# Altium PCB PCB_YMF288-M MegaMod_2021-11-02.pcbdoc
Units mil, origin at the board's own origin, x right, y up, seen from the top; angles counter-clockwise.
Board outline 4825 x 3175 mil, 2 copper layers (Top Layer, Bottom Layer); 31 components, 42 nets, 165 pads, 23 vias.
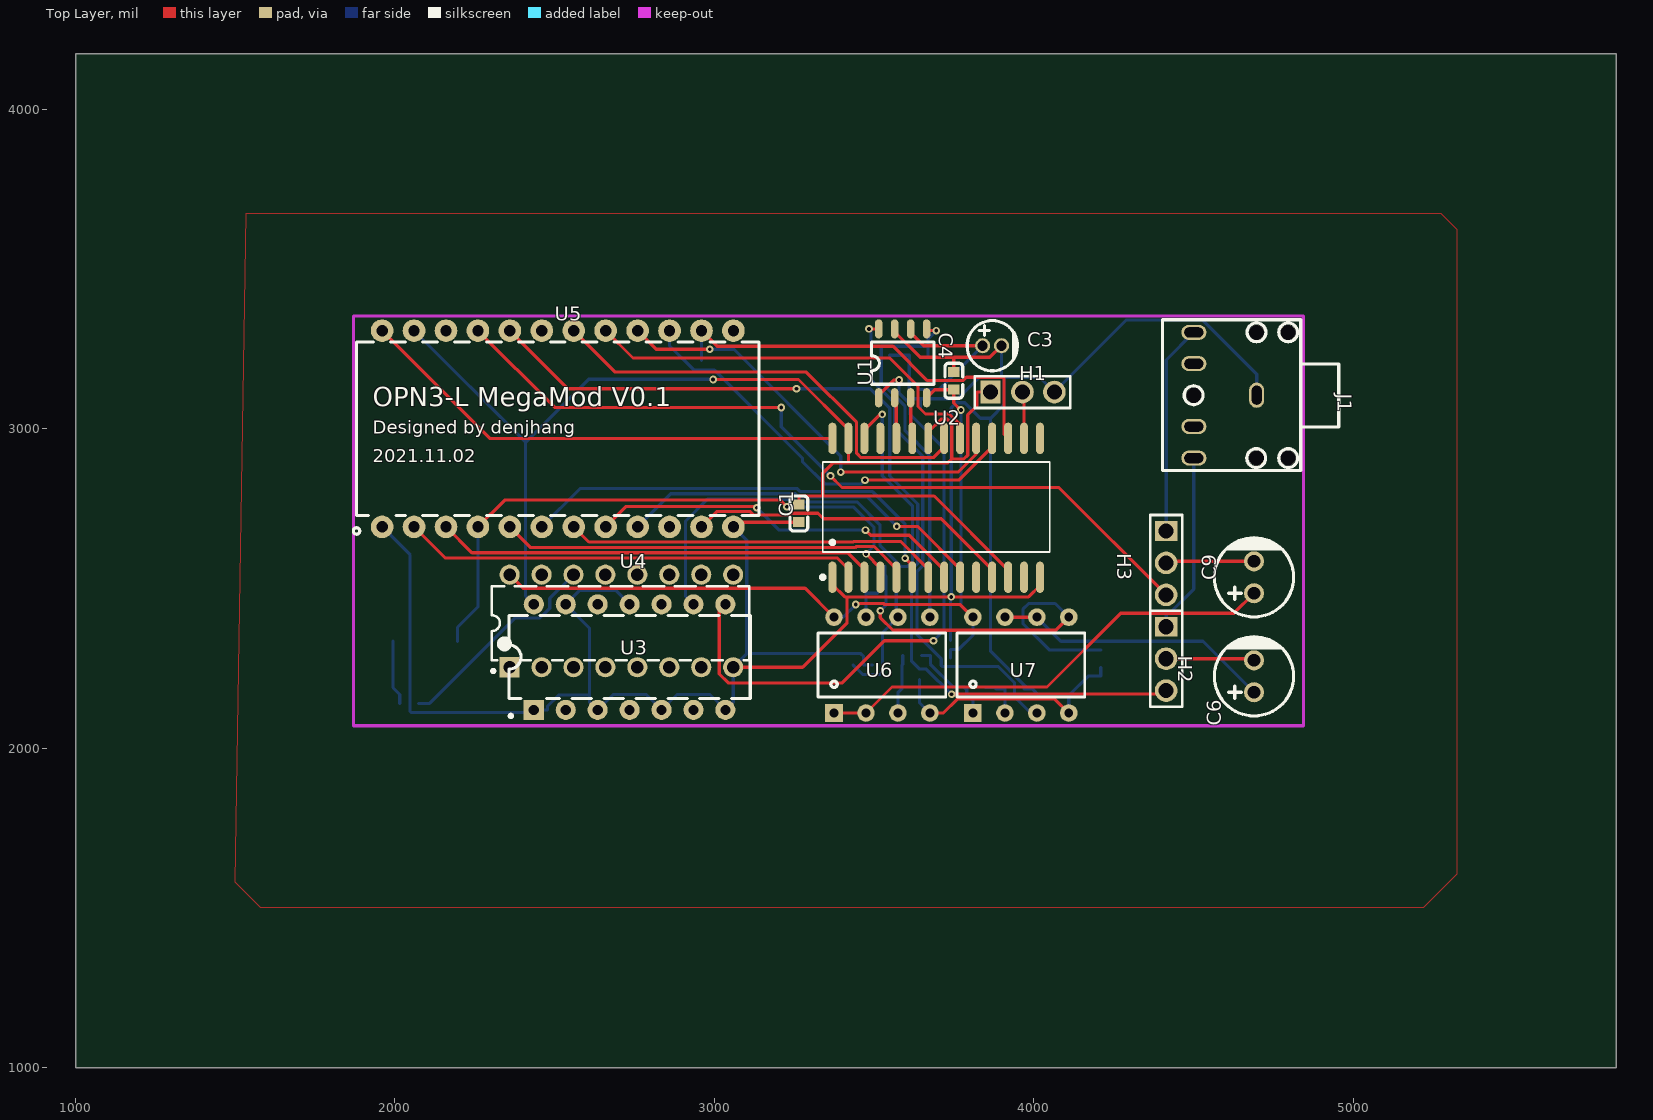
[diagram p0: Top Layer view]
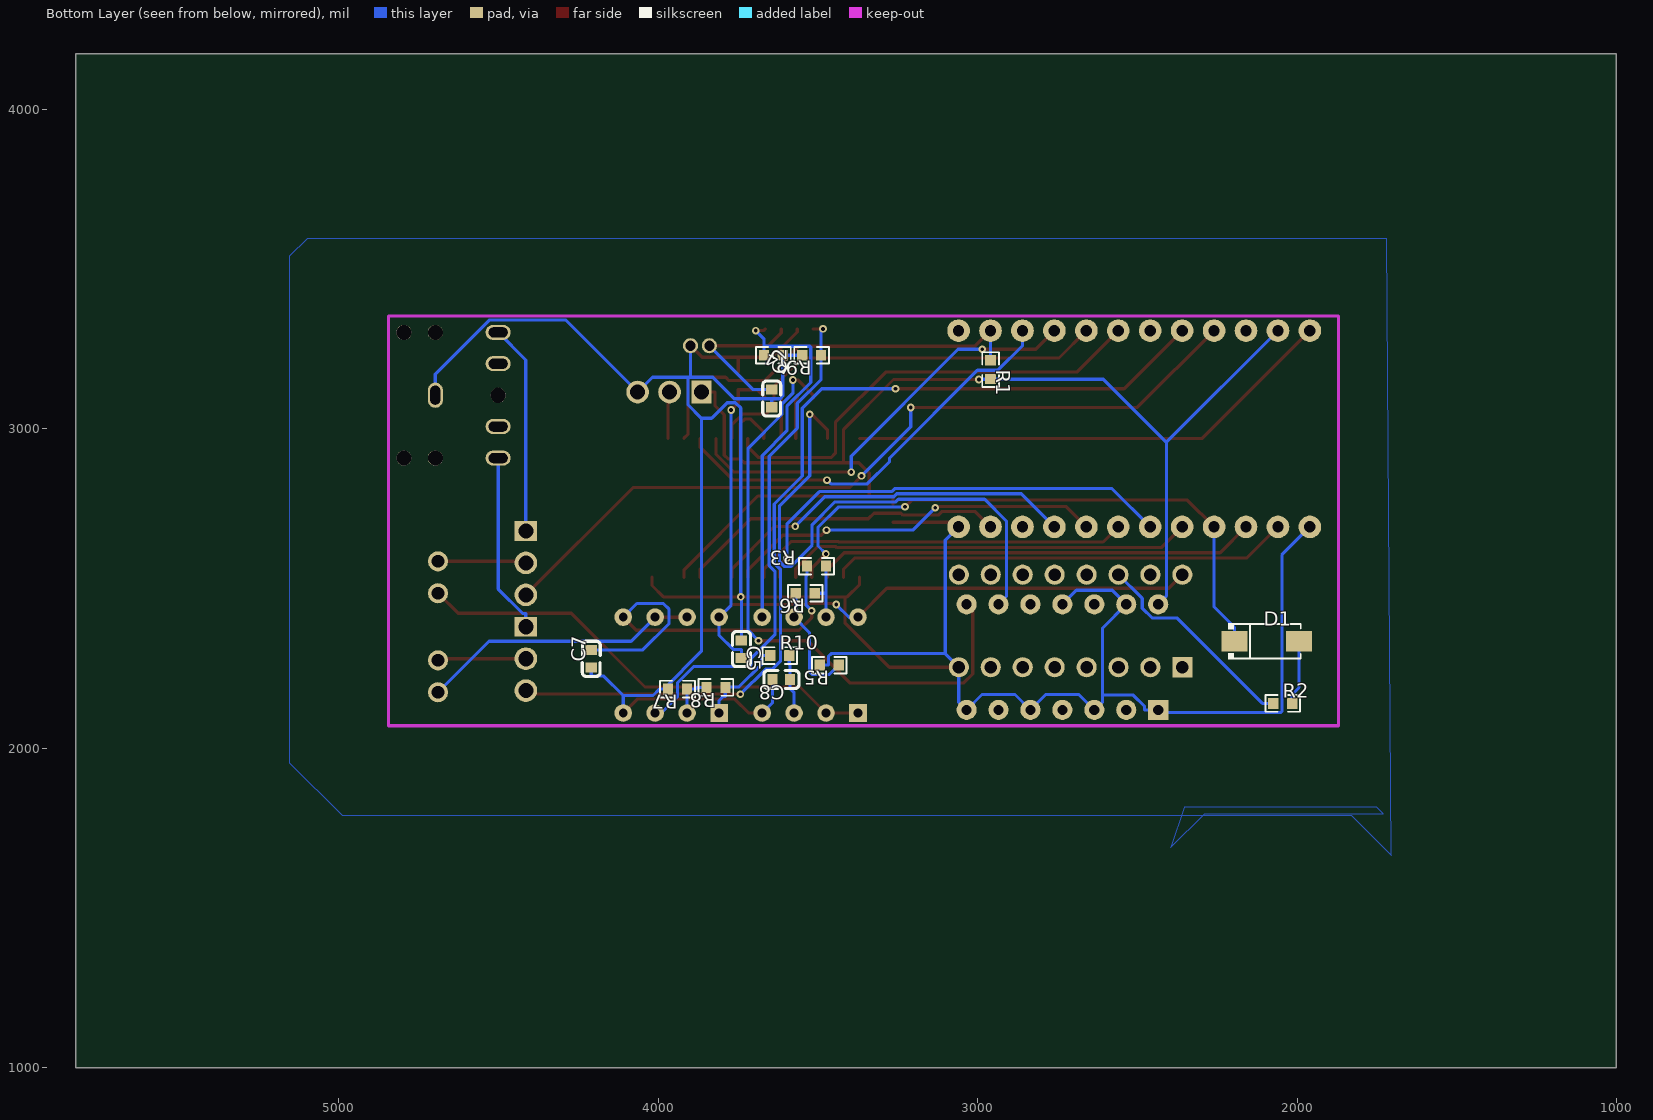
[diagram p1: Bottom Layer view, seen from below]

## Layer stack, top to bottom
Top Layer: signal copper (thickness not stored)
Dielectric: dielectric 12.6, FR-4, Dk 4.8
Bottom Layer: signal copper (thickness not stored)

## Board outline
5825,1000 1000,1000 1000,4175 5825,4175

## Components (designator, comment, footprint, x,y, rotation, side; value= is the part's Value field where it differs from the comment)
C1 "0.1u" C0603#1 3265,2735 r90 top
C2 "0.1u" C0603#2 3645,3095 r270 bottom
C3 "47uF" CAP-TH_BD4.0-P1.50-D0.8-FD 3870,3260 r0 top
C4 "0.1u" C0603#1 3750,3150 r270 top
C5 "0.1u" C0603#2 3740,2310 r90 bottom
C6 "4.7uF" CAP-TH_BD6.3-P2.50-D1.0-FD 4690,2225 r90 top
C7 "10n" C0603#2 4210,2280 r270 bottom
C8 "10n" C0603#2 3615,2215 r180 bottom
C9 "4.7uF" CAP-TH_BD6.3-P2.50-D1.0-FD 4690,2535 r90 top
D1 "SS14" SMA_L4.4-W2.8-LS5.4-RD 2095,2335 r0 bottom
H1 "Header-Male-2.54_1x3" HDR-TH_3P-P2.54-V-M-1 3965,3115 r0 top
H2 "Header-Male-2.54_1x3" HDR-TH_3P-P2.54-V-M-1 4415,2280 r270 top
H3 "Header-Male-2.54_1x3" HDR-TH_3P-P2.54-V-M-1 4415,2580 r270 top
J1 "PJ-307C" AUDIO-TH_PJ307C 4600,3105 r270 top
R1 "62k" R0603 2960,3185 r90 bottom
R2 "1k" R0603 2045,2140 r0 bottom
R3 "3.6k" R0603 3505,2570 r180 bottom
R4 "10k" R0603 3640,3230 r180 bottom
R5 "15k" R0603 3465,2260 r180 bottom
R6 "3.9k" R0603 3540,2485 r180 bottom
R7 "10k" R0603 3940,2185 r180 bottom
R8 "3.6k" R0603 3820,2190 r180 bottom
R9 "10k" R0603 3520,3230 r180 bottom
R10 "3.6k" R0603 3620,2290 r0 bottom
U1 "uPD6379GR" SOIC-8_L5.0-W4.0-P1.27-LS6.0-BL 3590,3205 r0 top
U2 "YMF288-M" SOP-28-YMF288 3695,2755 r0 top
U3 "74HC04N" DIP-14_L19.2-W6.6-P2.54-LS10.9-BL 2735,2285 r0 top
U4 "MegaGRRL IC-DCSG" DIP-16_L20.4-W5.8-P2.54-LS7.6-BL 2709.2,2398.19 r0 top
U5 "MegaGRRL IC-FM" DIP-24_L32.0-W13.8-P2.54-LS15.6-BL 2510,3000 r0 top
U6 "SA5532AP" DIP8 3525,2260 r0 top
U7 "SA5532AP" DIP8 3960,2260 r0 top

## Footprints (in the part's own frame and the unit in brackets; to place one, negate y for a bottom-side part, rotate by r counter-clockwise, add the part's x,y. Pads: shape width x height; smd on the part's side, far side on the other; paste and mask are expansions set on the pad)
AUDIO-TH_PJ307C [mm]
  oval 2x1.2 hole 0.8 slot 1.5 at 0 deg: 1(0,2.5)
  oval 1.2x2 hole 0.8 slot 1.5 at 90 deg: 2(5,-2.5) 3(2.489,-2.5) 4(-2.511,-2.5) 5(-5,-2.5)
  round 1.2 hole 1.2 unplated: ""(-5,2.5) ""(-5,5) ""(0,-2.5) ""(5,2.5) ""(5,5)
  silkscreen extent -6.01,-4.99 5.99,9.03
C0603#1 [mm]
  rect 0.8x0.9 smd: 1(-0.7,0) 2(0.7,0)
  silkscreen extent -1.41,-0.71 1.39,0.72
C0603#2 [mm]
  rect 0.8x0.9 smd: 1(0.7,0) 2(-0.7,0)
  silkscreen extent -1.39,-0.72 1.41,0.71
CAP-TH_BD4.0-P1.50-D0.8-FD [mm]
  round 1.2 hole 0.8: 1(-0.75,0) 2(0.75,0)
  silkscreen extent -1.98,-2 2.06,2
CAP-TH_BD6.3-P2.50-D1.0-FD [mm]
  round 1.6 hole 1: 1(-1.27,0) 2(1.27,0)
  silkscreen extent -3.15,-3.15 3.17,3.15
DIP8 [mil]
  rect 55x55 hole 28: 1(-150,-150)
  round 55 hole 28: 2(-50,-150) 3(50,-150) 4(150,-150) 5(150,150) 6(50,150) 7(-50,150) 8(-150,150)
  silkscreen extent -200,-100 200,100
DIP-14_L19.2-W6.6-P2.54-LS10.9-BL [mil]
  rect 63x63 hole 32: 1(-300,-165.35)
  round 63 hole 32: 2(-200,-165.35) 3(-100,-165.35) 4(0,-165.35) 5(100,-165.35) 6(200,-165.35) 7(300,-165.35) 8(300,165.35) 9(200,165.35) 10(100,165.35) 11(0,165.35) 12(-100,165.35) 13(-200,165.35) 14(-300,165.35)
  silkscreen extent -378,-189 378,130
DIP-16_L20.4-W5.8-P2.54-LS7.6-BL [mm]
  rect 1.6x1.6 hole 1: 1(-8.89,-3.68)
  round 1.6 hole 1: 2(-6.35,-3.68) 3(-3.81,-3.68) 4(-1.27,-3.68) 5(1.27,-3.68) 6(3.81,-3.68) 7(6.35,-3.68) 8(8.89,-3.68) 9(8.89,3.68) 10(6.35,3.68) 11(3.81,3.68) 12(1.27,3.68) 13(-1.27,3.68) 14(-3.81,3.68) 15(-6.35,3.68) 16(-8.89,3.68)
  silkscreen extent -10.31,-4.1 10.16,2.77
DIP-24_L32.0-W13.8-P2.54-LS15.6-BL [mm]
  round 1.8 hole 0.9: 1(-13.97,-7.8) 2(-11.43,-7.8) 3(-8.89,-7.8) 4(-6.35,-7.8) 5(-3.81,-7.8) 6(-1.27,-7.8) 7(1.27,-7.8) 8(3.81,-7.8) 9(6.35,-7.8) 10(8.89,-7.8) 11(11.43,-7.8) 12(13.97,-7.8) 13(13.97,7.8) 14(11.43,7.8) 15(8.89,7.8) 16(6.35,7.8) 17(3.81,7.8) 18(1.27,7.8) 19(-1.27,7.8) 20(-3.81,7.8) 21(-6.35,7.8) 22(-8.89,7.8) 23(-11.43,7.8) 24(-13.97,7.8)
  silkscreen extent -16.26,-8.38 16,6.9
HDR-TH_3P-P2.54-V-M-1 [mm]
  rect 1.575x1.8 hole 1.2: 1(-2.54,0)
  round 1.8 hole 1.2: 2(0,0) 3(2.54,0)
  silkscreen extent -3.81,-1.27 3.81,1.27
R0603 [mil]
  rect 31.75x34.02 smd: 1(29.66,0) 2(-29.66,0)
  silkscreen extent -55,-26 55,26
SMA_L4.4-W2.8-LS5.4-RD [mm]
  rect 2.046x1.62 smd: 1(2.566,0) 2(-2.565,0)
  silkscreen extent -2.7,-1.44 3.08,1.44
SOIC-8_L5.0-W4.0-P1.27-LS6.0-BL [mm]
  oval 0.6x1.52 smd: 1(-1.905,-2.74) 2(-0.635,-2.74) 3(0.635,-2.74) 4(1.905,-2.74) 5(1.905,2.74) 6(0.635,2.74) 7(-0.635,2.74) 8(-1.905,2.74)
  silkscreen extent -2.49,-1.67 2.5,1.7
SOP-28-YMF288 [mm]
  oval 0.63x2.5 smd: 1(-8.255,-5.588) 2(-6.985,-5.588) 3(-5.715,-5.588) 4(-4.445,-5.588) 5(-3.175,-5.588) 6(-1.905,-5.588) 7(-0.635,-5.588) 8(0.635,-5.588) 9(1.905,-5.588) 10(3.175,-5.588) 11(4.445,-5.588) 12(5.715,-5.588) 13(6.985,-5.588) 14(8.255,-5.588) 15(8.255,5.461) 16(6.985,5.461) 17(5.715,5.461) 18(4.445,5.461) 19(3.175,5.461) 20(1.905,5.461) 21(0.635,5.461) 22(-0.635,5.461) 23(-1.905,5.461) 24(-3.175,5.461) 25(-4.445,5.461) 26(-5.715,5.461) 27(-6.985,5.461) 28(-8.255,5.461)
  silkscreen extent -9.17,-5.74 9.03,3.57

## Via types
v1: diameter 24.02, hole 12.01, Top Layer to Bottom Layer, 23 vias

## Nets (pads, with @x,y where several pads share a name; then routed paths per layer and width w, separated by ;. In a path a pad name is that pad's centre, name@x,y a point inside that pad or via, vN(x,y) a via of type N, cw(c..) or ccw(c..) an arc to the next point about the centre after c; other vN are vias at no path point)
/COM: H1.2 U2.16 | length 147.1
  Top Layer w10: H1.2 3970,3110 U2.16
/CS: R1.1 U2.17 U5.14 | length 1303.9
  Top Layer w10: U5.14 2960.32,3307.09 3009.27,3258.14 3559.9,3258.14 3667.31,3150.73 3778.8,3150.73 3789.57,3161.5 3904.16,3161.5 3907.09,3158.57 3907.09,2982.91 U2.17
  Bottom Layer w10: R1.1 U5.14
/IC: U2.11 U5.11 | length 1034.1
  Top Layer w10: U5.11 3007.77,2740.68 3112.42,2740.68 3123.52,2729.58 3234.19,2729.58 3240.35,2735.74 3324.76,2735.74 3342.42,2718.08 3710.79,2718.08 3870,2558.87 U2.11
/LRO: U1.1 U3.8 | length 1942.6
  Top Layer w10: U3.8 3015.66,2431.01 3015.66,2232.23 3043.58,2204.31 3400.75,2204.31 3532.74,2336.3 v1(3686.56,2336.3) ; U1.1 3515,3105.3 3562.18,3152.48 v1(3578.72,3152.48)
  Bottom Layer w10: v1(3578.72,3152.48) 3578.72,3111.49 3613.6,3076.61 3613.6,3044.7 3719.19,2939.11 3719.19,2368.93 v1(3686.56,2336.3)
/RD: U2.19 U5.16 | length 1345.5
  Top Layer w10: U5.16 2818.2,3248.89 v1(2985.87,3248.89) ; v1(3396.17,2864.17) 3763.24,2864.17 3820,2920.93 U2.19
  Bottom Layer w10: v1(2985.87,3248.89) 3061.75,3248.89 3396.17,2914.47 v1(3396.17,2864.17)
/WR: U2.18 U5.15 | length 1317.3
  Top Layer w10: v1(3471.95,2839.3) 3765.38,2839.3 3870,2943.92 U2.18
  Bottom Layer w10: U5.15 2860,3259.88 2936.73,3183.15 3001.14,3183.15 3276.44,2907.85 3276.44,2896.76 3345.94,2827.26 3459.91,2827.26 v1(3471.95,2839.3)
A0: U2.20 U5.17 | length 1312
  Top Layer w10: U5.17 2745.51,3221.58 3549.81,3221.58 3637.89,3133.5 3637.89,3069.77 3661.29,3046.37 3736.39,3046.37 3770,3012.76 U2.20
A1: U2.21 U5.18 | length 1421.3
  Top Layer w10: U5.18 2689.62,3177.47 3288.17,3177.47 3445.83,3019.81 3445.83,2923.36 3459.61,2909.58 3685.44,2909.58 3720,2944.14 U2.21
A.VCC: C4.2 C5.2 U1.4 U4.16 U6.8 U7.8 | length 2546
  Top Layer w10: U4.16 2401.77,2500.5 3284.5,2500.5 U6.8 ; v1(3442.87,2449.62) 3446.31,2453.06 3529.58,2453.06 3533.02,2449.62 3770.38,2449.62 U7.8 ; U1.4 3690.31,3122.44 C4.2 3750,3080.78 v1(3772.22,3058.56)
  Bottom Layer w10: U6.8 3403.25,2410 v1(3442.87,2449.62) ; C5.2 3740,2309.26 3765.71,2309.26 3810,2353.55 U7.8 3772.22,2447.78 v1(3772.22,3058.56)
BCO: U1.3 U2.23 | length 129.2
  Top Layer w10: U1.3 3615,2975 U2.23
C6_1: C6.1 U7.6 U7.7 | length 877.3
  Top Layer w10: U7.7 U7.6
  Bottom Layer w10: U7.6 4085.35,2334.65 4530.35,2334.65 C6.1
C7_2: C7.2 R3.2 U7.5 | length 1284.1
  Top Layer w10: v1(3520.01,2429.98) 3520.01,2408.77 3559.76,2369.02 4069.02,2369.02 U7.5
  Bottom Layer w10: v1(3520.01,2429.98) 3537.3,2447.27 3537.3,2539.28 3534.66,2541.92 R3.2 ; U7.5 4067.05,2452.95 3984.78,2452.95 3966.33,2434.5 3966.33,2390.37 4049.14,2307.56 C7.2
C8_1: C8.1 R10.2 U6.3 | length 186.4
  Bottom Layer w10: U6.3 3575,2173.77 3587.44,2186.21 3587.44,2200.61 C8.1 3587.44,2259.02 3590.34,2261.92 R10.2
C9_1: C9.1 U6.1 U6.2 | length 1470.3
  Top Layer w10: U6.1 U6.2 3556.59,2191.59 4041.94,2191.59 4272.44,2422.09 4627.09,2422.09 C9.1
D0: U2.2 U5.2 | length 1440.6
  Top Layer w10: U5.2 2157.48,2595.43 3385.44,2595.43 3420,2560.87 U2.2
D1: U2.3 U5.3 | length 1389.8
  Top Layer w10: U5.3 2241.24,2611.67 3417.92,2611.67 3470,2559.59 U2.3
D1_2: D1.2 R2.2 | length 203.8
  Bottom Layer w10: D1.2 1994,2189.42 2015.34,2168.08 R2.2
D2: D1.1 U2.4 U5.4 | length 1880
  Top Layer w10: U5.4 2343.62,2776.53 3206.89,2776.53 v1(3227.69,2755.73) ; v1(3475.46,2608.22) 3520,2563.68 U2.4
  Bottom Layer w10: D1.1 2196,2377.96 2260,2441.96 U5.4 ; v1(3227.69,2755.73) 3228.56,2754.86 3437.39,2754.86 3500.26,2691.99 3500.26,2633.02 v1(3475.46,2608.22)
D3: U2.5 U5.5 | length 1294
  Top Layer w10: U5.5 2425.14,2627.77 3440.91,2627.77 3444.44,2631.3 3500.39,2631.3 3570,2561.69 U2.5
D4: U2.6 U5.6 | length 1408.8
  Top Layer w10: v1(3597.62,2594.43) 3620,2572.05 U2.6
  Bottom Layer w10: U5.6 2579.64,2812.55 3260.35,2812.55 3269.76,2803.14 3495.75,2803.14 3597.62,2701.27 v1(3597.62,2594.43)
D5: U2.7 U5.7 | length 1192.1
  Top Layer w10: U5.7 2607.59,2645.32 3435.7,2645.32 3437.77,2647.39 3583.22,2647.39 3670,2560.61 U2.7
D6: U2.8 U5.8 | length 1191.4
  Top Layer w10: U5.8 2723.87,2756.78 3128.96,2756.78 v1(3133.08,2752.66) ; v1(3473.69,2682.66) 3489.96,2666.39 3610.89,2666.39 3720,2557.28 U2.8
  Bottom Layer w10: v1(3133.08,2752.66) 3203.08,2682.66 v1(3473.69,2682.66)
D7: U2.9 U5.9 | length 1176.2
  Top Layer w10: v1(3571.59,2694.43) 3636.31,2694.43 3770,2560.74 U2.9
  Bottom Layer w10: U5.9 2863.51,2796.42 3253.72,2796.42 3263.1,2787.04 3478.98,2787.04 v1(3571.59,2694.43)
DO: U1.2 U2.24 | length 129.2
  Top Layer w10: U1.2 3570,3092.13 U2.24
GND: C1.1 C2.1 C3.2 C4.1 C5.1 C7.1 C8.2 H1.3 J1.1 R4.1 R5.2 R7.2 R9.2 U1.7 U2.1 U2.14 U3.1 U3.3 U3.5 U3.7 U3.11 U3.13 U4.8 U5.1 U5.12 U6.4 U7.4 | length 9778.9
  Top Layer w10: U4.8 3276.61,2253.31 3415.88,2392.58 3415.88,2473.58 ; U5.12 3074.53,2707.44 C1.1 ; U2.1 3370,2512.54 3408.96,2473.58 3415.88,2473.58 ; U1.7 3565,3303.12 3644.45,3223.67 3750,3223.67 ; U6.4 3717.28,2110 3760.83,2153.55 4066.45,2153.55 U7.4 ; C4.1 3750,3204.38 3750,3223.67 ; C3.2 3863.2,3223.67 3750,3223.67 ; U2.14 4020,2509.31 3984.27,2473.58 v1(3742.28,2473.58) 3415.88,2473.58
  Bottom Layer w10: U5.1 2047.7,2605.21 2047.7,2114.84 2050.63,2111.91 2448.55,2111.91 U3.1@2456.29,2119.65 ; U3.1 U3.1@2456.29,2119.65 ; U3.11 2691.12,2494.23 2578.88,2494.23 U3.13 2609.22,2376.13 2609.22,2165.96 ; U5.12 3101.96,2650.95 3101.96,2296.07 ; R5.2 3467.71,2260 3467.71,2286.95 3458.59,2296.07 3101.96,2296.07 ; R9.2 R4.1 3610.34,3102.64 3618.72,3094.26 3645,3094.26 ; C8.2 3642.56,2142.44 U6.4 ; C2.1 3645,3080.85 3645,3094.26 ; C5.1 3740,2364.38 3740,2471.3 v1(3742.28,2473.58) 3742.28,3065.29 3758.64,3081.65 3784.92,3081.65 3833.46,3033.11 3865.19,3033.11 ; C3.2 3899.53,3161.5 ; R7.2 R7.2@3983.13,2185 ; U7.4 4110,2164.89 ; C7.1 4210,2225.62 4170.73,2225.62 4110,2164.89 ; J1.1 4698.43,3170.54 4528.15,3340.82 4290.82,3340.82 H1.3 4018.5,3161.5 3907.07,3161.5 ; U3.1@2456.29,2119.65 2477.57,2119.65 2477.57,2130.29 2513.24,2165.96 2609.22,2165.96 ; 2609.22,2165.96 2609.22,2145.43 U3.3 2683.23,2167.88 2786.77,2167.88 U3.5 2883.23,2167.88 2986.77,2167.88 U3.7 3059.2,2143.85 U4.8 3101.96,2296.07 ; 3645,3094.26 3762.18,3094.26 3829.42,3161.5 3899.53,3161.5 ; 3865.19,3033.11 3907.07,3074.99 3907.07,3161.5 ; 3865.19,3033.11 3865.19,2302.94 R7.2@3983.13,2185 ; 3899.53,3161.5 3907.07,3161.5 ; R7.2@3983.13,2185 3996.6,2185 4016.71,2164.89 4110,2164.89
H2_2: C6.2 H2.2 | length 277.1
  Top Layer w10: H2.2 4685,2280 C6.2
H3_2: C9.2 H3.2 | length 277.1
  Top Layer w10: H3.2 4420,2585 C9.2
IN.L: H3.3 U5.21 | length 2532.9
  Top Layer w10: U5.21 2500.26,3066.83 v1(3209.76,3066.83) ; v1(3363.75,2852.51) 3400.04,2816.22 4078.78,2816.22 H3.3
  Bottom Layer w10: v1(3209.76,3066.83) 3209.76,3006.5 v1(3363.75,2852.51)
IN.R: H2.3 U5.20 | length 2971.1
  Top Layer w10: U5.20 2541.66,3125.43 v1(3257.69,3125.43) ; v1(3743.14,2168.51) 3744.28,2169.65 4404.65,2169.65 H2.3
  Bottom Layer w10: v1(3257.69,3125.43) 3488.54,3125.43 3549.24,3064.73 3549.24,2852.24 3636.96,2764.52 3636.96,2578.36 3617.31,2558.71 3617.31,2273.81 3643.48,2247.64 3664.01,2247.64 v1(3743.14,2168.51)
LOUT: R9.1 U1.8 U7.3 | length 1580.4
  Top Layer w10: v1(3484.54,3312.87) U1.8
  Bottom Layer w10: v1(3484.54,3312.87) 3490.34,3307.07 R9.1 3490.34,3201.92 3490.34,3154.35 3565.33,3079.36 3565.33,3002.11 3653.05,2914.39 3653.05,2571.69 3635.04,2553.68 3635.04,2355.19 3710.69,2279.54 3710.69,2258.54 3713.62,2255.61 3889.75,2255.61 3940,2205.36 3940,2160.69 3990.69,2110 U7.3
LRO: U2.26 U3.9 | length 1742.6
  Top Layer w10: U2.26 3470,2995.71 3519.32,3045.03 v1(3526.15,3045.03)
  Bottom Layer w10: U3.9 2910,2475.35 2910,2710.41 2978.65,2779.06 3248.32,2779.06 3256.43,2770.95 3447.07,2770.95 3518.56,2699.46 3518.56,2635.88 3586.03,2568.41 3604.25,2568.41 3620.87,2585.03 3620.87,2757.85 3526.15,2852.57 v1(3526.15,3045.03)
MCLK: U2.28 U5.24 | length 1549.6
  Top Layer w10: U5.24 2297.09,2970 U2.28
OUT.L: H3.1 J1.5 | length 657.7
  Bottom Layer w10: H3.1 4415,3215.27 J1.5
OUT.R: H2.1 J1.2 | length 570.2
  Bottom Layer w10: H2.1 4415,2422.07 4425.52,2422.07 4501.58,2498.13 J1.2
R2_1: R2.1 U4.14 | length 669.4
  Bottom Layer w10: R2.1 2108.85,2140 2376.62,2407.77 2454.46,2407.77 2485,2438.31 2485,2468.87 U4.14
R3_1: R3.1 R6.1 U6.7 | length 195.1
  Bottom Layer w10: U6.7 3475,2484.66 3475.34,2485 ; R3.1 3475.34,2541.92 3475.34,2485 ; R6.1 3483.4,2485 3475.34,2485
R10_1: R8.1 R10.1 U7.1 | length 292.6
  Bottom Layer w10: R10.1 3676.6,2290 3676.6,2263.06 3748.07,2191.59 3781.73,2191.59 R8.1@3790.34,2182.98 ; R8.1 R8.1@3790.34,2182.98 ; U7.1 3810,2148.57 3796.65,2161.92 3790.34,2161.92 R8.1@3790.34,2182.98
ROUT: R4.2 U1.5 U6.5 | length 1176.8
  Top Layer w10: U1.5 3670.59,3307.28 v1(3695.19,3307.28)
  Bottom Layer w10: R4.2 3669.66,3258.09 ; U6.5 3675,2916.01 3597.5,2993.51 3597.5,3069.95 3522.7,3144.75 3522.7,3255.17 3525.62,3258.09 3669.66,3258.09 ; v1(3695.19,3307.28) 3669.66,3281.75 3669.66,3258.09
U1_6: C2.2 C3.1 U1.6 | length 507.1
  Top Layer w10: U1.6 3615,3300.36 3655.36,3260 C3.1
  Bottom Layer w10: C2.2 3703.03,3122.56 C3.1
U6_6: R5.1 R6.2 U6.6 | length 375.4
  Bottom Layer w10: R5.1 3464.88,2230.46 3518.18,2230.46 3527.13,2239.41 3527.13,2362.13 U6.6 3569.66,2415.34 R6.2
U7_2: R7.1 R8.2 U7.2 | length 137.9
  Bottom Layer w10: R8.2 3878.4,2190 3883.4,2185 R7.1 3910.34,2156.92 3910,2156.58 U7.2
VCC: C1.2 H1.1 R1.2 U2.12 U2.22 U2.27 U3.14 U5.23 | length 4102.8
  Top Layer w10: v1@2996.45,3154.37 3263.8,3154.37 3420,2998.17 U2.27 3420,2893.49 ; C1.2 3265,2789.38 3339.64,2789.38 ; U2.22 3670.01,2990.01 3710.28,3030.28 3729.72,3030.28 3743.47,3016.53 3743.47,2905.33 ; H1.1 3822.93,3115 3822.93,3072.93 3793.48,3043.48 3793.48,2917.17 3781.64,2905.33 3743.47,2905.33 ; U2.12 3920,2557.61 3688.23,2789.38 3339.64,2789.38 ; 3339.64,2789.38 3339.64,2861.04 3372.09,2893.49 3420,2893.49 ; 3420,2893.49 3731.63,2893.49 3743.47,2905.33
  Bottom Layer w10: U5.23 2409.22,2957.87 ; U3.14 2409.22,2476.13 2409.22,2957.87 ; v1@2996.45,3154.37 2989.05,3154.37 2988.08,3155.34 R1.2 2606.69,3155.34 2409.22,2957.87
  other v1: 2996.45,3154.37
pads on no net: J1. J1.3 J1.4 U2.10 U2.13 U2.15 U2.25 U3.2 U3.4 U3.6 U3.10 U3.12 U4.1 U4.2 U4.3 U4.4 U4.5 U4.6 U4.7 U4.9 U4.10 U4.11 U4.12 U4.13 U4.15 U5.10 U5.13 U5.19 U5.22

## Polygon pours and split planes (outlines as drawn)
GND on Top Layer (solid): 1535,3675 5275,3675 5325,3625 5325,1605 5220,1500 1580,1500 1500,1580
GND on Bottom Layer (solid): 2354.15,1815 2395,1690 2290,1795 1730,1795 1750,1815 2354.15,1815
GND on Bottom Layer (solid): 1720,3595 5100,3595 5155,3540 5155,1955 4990,1790 1830,1790 1705,1665

## Silkscreen, mask and mechanical layers (free items; w line width, h text height)
Top Overlay:
  text "OPN3-L MegaMod V0.1" at 1930,3070.47 h59.05
  text "Designed by denjhang" at 1930,2983.84 h40.63
  text "2021.11.02" at 1930,2894.68 h40.63